# EAGLE board UCirKitBreadboard-0823 (EAGLE 6.5.0), part 1 of 2

Size 70 x 100 mm. Coordinates in mm from the lower left corner, seen from the top.
Outline: 0,0 70,0 70,100 0,100 0,0
Copper layers (1*16): Top 0.035mm / dielectric 1.5mm / Bottom 0.035mm
Design rules "default": minimum track width 10mil, minimum drill 24mil, track to track 8mil, track to pad 8mil, pad to pad 8mil, via to via 8mil, smd to smd 8mil, copper to edge 40mil, drill to drill 8mil, minimum pad ring 10mil, minimum via ring 8mil, stop-mask expansion 4mil, vias tented up to drill 0mil, thermal gap 10mil

## Footprints (pad centres in the part's own frame; a part is rotated, then mirrored left to right if it is on the bottom)
1X01_WITHOUT_TEXT = drill 1.016 pad 1.88: 1 0,0
1X01_SMD_3.25X0.85MM_NO_SILK = smd 3.25 x 0.85: P$1 0,0

## Placement (x,y rotation side)
JP1  [1X01_WITHOUT_TEXT]  19.76,86.83 0 top
JP2  [1X01_WITHOUT_TEXT]  22.3,86.83 0 top
JP3  [1X01_WITHOUT_TEXT]  24.84,86.83 0 top
JP4  [1X01_WITHOUT_TEXT]  27.38,86.83 0 top
JP5  [1X01_WITHOUT_TEXT]  29.92,86.83 0 top
JP6  [1X01_WITHOUT_TEXT]  40.08,86.83 0 top
JP7  [1X01_WITHOUT_TEXT]  42.62,86.83 0 top
JP8  [1X01_WITHOUT_TEXT]  45.16,86.83 0 top
JP9  [1X01_WITHOUT_TEXT]  47.7,86.83 0 top
JP10  [1X01_WITHOUT_TEXT]  50.24,86.83 0 top
JP11  [1X01_WITHOUT_TEXT]  19.76,84.29 0 top
JP12  [1X01_WITHOUT_TEXT]  22.3,84.29 0 top
JP13  [1X01_WITHOUT_TEXT]  24.84,84.29 0 top
JP14  [1X01_WITHOUT_TEXT]  27.38,84.29 0 top
JP15  [1X01_WITHOUT_TEXT]  29.92,84.29 0 top
JP16  [1X01_WITHOUT_TEXT]  40.08,84.29 0 top
JP17  [1X01_WITHOUT_TEXT]  42.62,84.29 0 top
JP18  [1X01_WITHOUT_TEXT]  45.16,84.29 0 top
JP19  [1X01_WITHOUT_TEXT]  47.7,84.29 0 top
JP20  [1X01_WITHOUT_TEXT]  50.24,84.29 0 top
JP21  [1X01_WITHOUT_TEXT]  19.76,81.75 0 top
JP22  [1X01_WITHOUT_TEXT]  22.3,81.75 0 top
JP23  [1X01_WITHOUT_TEXT]  24.84,81.75 0 top
JP24  [1X01_WITHOUT_TEXT]  27.38,81.75 0 top
JP25  [1X01_WITHOUT_TEXT]  29.92,81.75 0 top
JP26  [1X01_WITHOUT_TEXT]  40.08,81.75 0 top
JP27  [1X01_WITHOUT_TEXT]  42.62,81.75 0 top
JP28  [1X01_WITHOUT_TEXT]  45.16,81.75 0 top
JP29  [1X01_WITHOUT_TEXT]  47.7,81.75 0 top
JP30  [1X01_WITHOUT_TEXT]  50.24,81.75 0 top
JP31  [1X01_WITHOUT_TEXT]  19.76,79.21 0 top
JP32  [1X01_WITHOUT_TEXT]  22.3,79.21 0 top
JP33  [1X01_WITHOUT_TEXT]  24.84,79.21 0 top
JP34  [1X01_WITHOUT_TEXT]  27.38,79.21 0 top
JP35  [1X01_WITHOUT_TEXT]  29.92,79.21 0 top
JP36  [1X01_WITHOUT_TEXT]  40.08,79.21 0 top
JP37  [1X01_WITHOUT_TEXT]  42.62,79.21 0 top
JP38  [1X01_WITHOUT_TEXT]  45.16,79.21 0 top
JP39  [1X01_WITHOUT_TEXT]  47.7,79.21 0 top
JP40  [1X01_WITHOUT_TEXT]  50.24,79.21 0 top
JP41  [1X01_WITHOUT_TEXT]  19.76,76.67 0 top
JP42  [1X01_WITHOUT_TEXT]  22.3,76.67 0 top
JP43  [1X01_WITHOUT_TEXT]  24.84,76.67 0 top
JP44  [1X01_WITHOUT_TEXT]  27.38,76.67 0 top
JP45  [1X01_WITHOUT_TEXT]  29.92,76.67 0 top
JP46  [1X01_WITHOUT_TEXT]  40.08,76.67 0 top
JP47  [1X01_WITHOUT_TEXT]  42.62,76.67 0 top
JP48  [1X01_WITHOUT_TEXT]  45.16,76.67 0 top
JP49  [1X01_WITHOUT_TEXT]  47.7,76.67 0 top
JP50  [1X01_WITHOUT_TEXT]  50.24,76.67 0 top
JP51  [1X01_WITHOUT_TEXT]  19.76,74.13 0 top
JP52  [1X01_WITHOUT_TEXT]  22.3,74.13 0 top
JP53  [1X01_WITHOUT_TEXT]  24.84,74.13 0 top
JP54  [1X01_WITHOUT_TEXT]  27.38,74.13 0 top
JP55  [1X01_WITHOUT_TEXT]  29.92,74.13 0 top
JP56  [1X01_WITHOUT_TEXT]  40.08,74.13 0 top
JP57  [1X01_WITHOUT_TEXT]  42.62,74.13 0 top
JP58  [1X01_WITHOUT_TEXT]  45.16,74.13 0 top
JP59  [1X01_WITHOUT_TEXT]  47.7,74.13 0 top
JP60  [1X01_WITHOUT_TEXT]  50.24,74.13 0 top
JP61  [1X01_WITHOUT_TEXT]  19.76,71.59 0 top
JP62  [1X01_WITHOUT_TEXT]  22.3,71.59 0 top
JP63  [1X01_WITHOUT_TEXT]  24.84,71.59 0 top
JP64  [1X01_WITHOUT_TEXT]  27.38,71.59 0 top
JP65  [1X01_WITHOUT_TEXT]  29.92,71.59 0 top
JP66  [1X01_WITHOUT_TEXT]  40.08,71.59 0 top
JP67  [1X01_WITHOUT_TEXT]  42.62,71.59 0 top
JP68  [1X01_WITHOUT_TEXT]  45.16,71.59 0 top
JP69  [1X01_WITHOUT_TEXT]  47.7,71.59 0 top
JP70  [1X01_WITHOUT_TEXT]  50.24,71.59 0 top
JP71  [1X01_WITHOUT_TEXT]  19.76,69.05 0 top
JP72  [1X01_WITHOUT_TEXT]  22.3,69.05 0 top
JP73  [1X01_WITHOUT_TEXT]  24.84,69.05 0 top
JP74  [1X01_WITHOUT_TEXT]  27.38,69.05 0 top
JP75  [1X01_WITHOUT_TEXT]  29.92,69.05 0 top
JP76  [1X01_WITHOUT_TEXT]  40.08,69.05 0 top
JP77  [1X01_WITHOUT_TEXT]  42.62,69.05 0 top
JP78  [1X01_WITHOUT_TEXT]  45.16,69.05 0 top
JP79  [1X01_WITHOUT_TEXT]  47.7,69.05 0 top
JP80  [1X01_WITHOUT_TEXT]  50.24,69.05 0 top
JP81  [1X01_WITHOUT_TEXT]  19.76,66.51 0 top
JP82  [1X01_WITHOUT_TEXT]  22.3,66.51 0 top
JP83  [1X01_WITHOUT_TEXT]  24.84,66.51 0 top
JP84  [1X01_WITHOUT_TEXT]  27.38,66.51 0 top
JP85  [1X01_WITHOUT_TEXT]  29.92,66.51 0 top
JP86  [1X01_WITHOUT_TEXT]  40.08,66.51 0 top
JP87  [1X01_WITHOUT_TEXT]  42.62,66.51 0 top
JP88  [1X01_WITHOUT_TEXT]  45.16,66.51 0 top
JP89  [1X01_WITHOUT_TEXT]  47.7,66.51 0 top
JP90  [1X01_WITHOUT_TEXT]  50.24,66.51 0 top
JP91  [1X01_WITHOUT_TEXT]  19.76,63.97 0 top
JP92  [1X01_WITHOUT_TEXT]  22.3,63.97 0 top
JP93  [1X01_WITHOUT_TEXT]  24.84,63.97 0 top
JP94  [1X01_WITHOUT_TEXT]  27.38,63.97 0 top
JP95  [1X01_WITHOUT_TEXT]  29.92,63.97 0 top
JP96  [1X01_WITHOUT_TEXT]  40.08,63.97 0 top
JP97  [1X01_WITHOUT_TEXT]  42.62,63.97 0 top
JP98  [1X01_WITHOUT_TEXT]  45.16,63.97 0 top
JP99  [1X01_WITHOUT_TEXT]  47.7,63.97 0 top
JP100  [1X01_WITHOUT_TEXT]  50.24,63.97 0 top
JP101  [1X01_WITHOUT_TEXT]  19.76,61.43 0 top
JP102  [1X01_WITHOUT_TEXT]  22.3,61.43 0 top
JP103  [1X01_WITHOUT_TEXT]  24.84,61.43 0 top
JP104  [1X01_WITHOUT_TEXT]  27.38,61.43 0 top
JP105  [1X01_WITHOUT_TEXT]  29.92,61.43 0 top
JP106  [1X01_WITHOUT_TEXT]  40.08,61.43 0 top
JP107  [1X01_WITHOUT_TEXT]  42.62,61.43 0 top
JP108  [1X01_WITHOUT_TEXT]  45.16,61.43 0 top
JP109  [1X01_WITHOUT_TEXT]  47.7,61.43 0 top
JP110  [1X01_WITHOUT_TEXT]  50.24,61.43 0 top
JP111  [1X01_WITHOUT_TEXT]  19.76,58.89 0 top
JP112  [1X01_WITHOUT_TEXT]  22.3,58.89 0 top
JP113  [1X01_WITHOUT_TEXT]  24.84,58.89 0 top
JP114  [1X01_WITHOUT_TEXT]  27.38,58.89 0 top
JP115  [1X01_WITHOUT_TEXT]  29.92,58.89 0 top
JP116  [1X01_WITHOUT_TEXT]  40.08,58.89 0 top
JP117  [1X01_WITHOUT_TEXT]  42.62,58.89 0 top
JP118  [1X01_WITHOUT_TEXT]  45.16,58.89 0 top
JP119  [1X01_WITHOUT_TEXT]  47.7,58.89 0 top
JP120  [1X01_WITHOUT_TEXT]  50.24,58.89 0 top
JP121  [1X01_WITHOUT_TEXT]  19.76,56.35 0 top
JP122  [1X01_WITHOUT_TEXT]  22.3,56.35 0 top
JP123  [1X01_WITHOUT_TEXT]  24.84,56.35 0 top
JP124  [1X01_WITHOUT_TEXT]  27.38,56.35 0 top
JP125  [1X01_WITHOUT_TEXT]  29.92,56.35 0 top
JP126  [1X01_WITHOUT_TEXT]  40.08,56.35 0 top
JP127  [1X01_WITHOUT_TEXT]  42.62,56.35 0 top
JP128  [1X01_WITHOUT_TEXT]  45.16,56.35 0 top
JP129  [1X01_WITHOUT_TEXT]  47.7,56.35 0 top
JP130  [1X01_WITHOUT_TEXT]  50.24,56.35 0 top
JP131  [1X01_WITHOUT_TEXT]  19.76,53.81 0 top
JP132  [1X01_WITHOUT_TEXT]  22.3,53.81 0 top
JP133  [1X01_WITHOUT_TEXT]  24.84,53.81 0 top
JP134  [1X01_WITHOUT_TEXT]  27.38,53.81 0 top
JP135  [1X01_WITHOUT_TEXT]  29.92,53.81 0 top
JP136  [1X01_WITHOUT_TEXT]  40.08,53.81 0 top
JP137  [1X01_WITHOUT_TEXT]  42.62,53.81 0 top
JP138  [1X01_WITHOUT_TEXT]  45.16,53.81 0 top
JP139  [1X01_WITHOUT_TEXT]  47.7,53.81 0 top
JP140  [1X01_WITHOUT_TEXT]  50.24,53.81 0 top
JP141  [1X01_WITHOUT_TEXT]  19.76,51.27 0 top
JP142  [1X01_WITHOUT_TEXT]  22.3,51.27 0 top
JP143  [1X01_WITHOUT_TEXT]  24.84,51.27 0 top
JP144  [1X01_WITHOUT_TEXT]  27.38,51.27 0 top
JP145  [1X01_WITHOUT_TEXT]  29.92,51.27 0 top
JP146  [1X01_WITHOUT_TEXT]  40.08,51.27 0 top
JP147  [1X01_WITHOUT_TEXT]  42.62,51.27 0 top
JP148  [1X01_WITHOUT_TEXT]  45.16,51.27 0 top
JP149  [1X01_WITHOUT_TEXT]  47.7,51.27 0 top
JP150  [1X01_WITHOUT_TEXT]  50.24,51.27 0 top
JP151  [1X01_WITHOUT_TEXT]  19.76,48.73 0 top
JP152  [1X01_WITHOUT_TEXT]  22.3,48.73 0 top
JP153  [1X01_WITHOUT_TEXT]  24.84,48.73 0 top
JP154  [1X01_WITHOUT_TEXT]  27.38,48.73 0 top
JP155  [1X01_WITHOUT_TEXT]  29.92,48.73 0 top
JP156  [1X01_WITHOUT_TEXT]  40.08,48.73 0 top
JP157  [1X01_WITHOUT_TEXT]  42.62,48.73 0 top
JP158  [1X01_WITHOUT_TEXT]  45.16,48.73 0 top
JP159  [1X01_WITHOUT_TEXT]  47.7,48.73 0 top
JP160  [1X01_WITHOUT_TEXT]  50.24,48.73 0 top
JP161  [1X01_WITHOUT_TEXT]  19.76,46.19 0 top
JP162  [1X01_WITHOUT_TEXT]  22.3,46.19 0 top
JP163  [1X01_WITHOUT_TEXT]  24.84,46.19 0 top
JP164  [1X01_WITHOUT_TEXT]  27.38,46.19 0 top
JP165  [1X01_WITHOUT_TEXT]  29.92,46.19 0 top
JP166  [1X01_WITHOUT_TEXT]  40.08,46.19 0 top
JP167  [1X01_WITHOUT_TEXT]  42.62,46.19 0 top
JP168  [1X01_WITHOUT_TEXT]  45.16,46.19 0 top
JP169  [1X01_WITHOUT_TEXT]  47.7,46.19 0 top
JP170  [1X01_WITHOUT_TEXT]  50.24,46.19 0 top
JP171  [1X01_WITHOUT_TEXT]  19.76,43.65 0 top
JP172  [1X01_WITHOUT_TEXT]  22.3,43.65 0 top
JP173  [1X01_WITHOUT_TEXT]  24.84,43.65 0 top
JP174  [1X01_WITHOUT_TEXT]  27.38,43.65 0 top
JP175  [1X01_WITHOUT_TEXT]  29.92,43.65 0 top
JP176  [1X01_WITHOUT_TEXT]  40.08,43.65 0 top
JP177  [1X01_WITHOUT_TEXT]  42.62,43.65 0 top
JP178  [1X01_WITHOUT_TEXT]  45.16,43.65 0 top
JP179  [1X01_WITHOUT_TEXT]  47.7,43.65 0 top
JP180  [1X01_WITHOUT_TEXT]  50.24,43.65 0 top
JP181  [1X01_WITHOUT_TEXT]  19.76,41.11 0 top
JP182  [1X01_WITHOUT_TEXT]  22.3,41.11 0 top
JP183  [1X01_WITHOUT_TEXT]  24.84,41.11 0 top
JP184  [1X01_WITHOUT_TEXT]  27.38,41.11 0 top
JP185  [1X01_WITHOUT_TEXT]  29.92,41.11 0 top
JP186  [1X01_WITHOUT_TEXT]  40.08,41.11 0 top
JP187  [1X01_WITHOUT_TEXT]  42.62,41.11 0 top
JP188  [1X01_WITHOUT_TEXT]  45.16,41.11 0 top
JP189  [1X01_WITHOUT_TEXT]  47.7,41.11 0 top
JP190  [1X01_WITHOUT_TEXT]  50.24,41.11 0 top
JP191  [1X01_WITHOUT_TEXT]  19.76,38.57 0 top
JP192  [1X01_WITHOUT_TEXT]  22.3,38.57 0 top
JP193  [1X01_WITHOUT_TEXT]  24.84,38.57 0 top
JP194  [1X01_WITHOUT_TEXT]  27.38,38.57 0 top
JP195  [1X01_WITHOUT_TEXT]  29.92,38.57 0 top
JP196  [1X01_WITHOUT_TEXT]  40.08,38.57 0 top
JP197  [1X01_WITHOUT_TEXT]  42.62,38.57 0 top
JP198  [1X01_WITHOUT_TEXT]  45.16,38.57 0 top
JP199  [1X01_WITHOUT_TEXT]  47.7,38.57 0 top
JP200  [1X01_WITHOUT_TEXT]  50.24,38.57 0 top
JP201  [1X01_WITHOUT_TEXT]  19.76,36.03 0 top
JP202  [1X01_WITHOUT_TEXT]  22.3,36.03 0 top
JP203  [1X01_WITHOUT_TEXT]  24.84,36.03 0 top
JP204  [1X01_WITHOUT_TEXT]  27.38,36.03 0 top
JP205  [1X01_WITHOUT_TEXT]  29.92,36.03 0 top
JP206  [1X01_WITHOUT_TEXT]  40.08,36.03 0 top
JP207  [1X01_WITHOUT_TEXT]  42.62,36.03 0 top
JP208  [1X01_WITHOUT_TEXT]  45.16,36.03 0 top
JP209  [1X01_WITHOUT_TEXT]  47.7,36.03 0 top
JP210  [1X01_WITHOUT_TEXT]  50.24,36.03 0 top
JP211  [1X01_WITHOUT_TEXT]  19.76,33.49 0 top
JP212  [1X01_WITHOUT_TEXT]  22.3,33.49 0 top
JP213  [1X01_WITHOUT_TEXT]  24.84,33.49 0 top
JP214  [1X01_WITHOUT_TEXT]  27.38,33.49 0 top
JP215  [1X01_WITHOUT_TEXT]  29.92,33.49 0 top
JP216  [1X01_WITHOUT_TEXT]  40.08,33.49 0 top
JP217  [1X01_WITHOUT_TEXT]  42.62,33.49 0 top
JP218  [1X01_WITHOUT_TEXT]  45.16,33.49 0 top
JP219  [1X01_WITHOUT_TEXT]  47.7,33.49 0 top
JP220  [1X01_WITHOUT_TEXT]  50.24,33.49 0 top
JP221  [1X01_WITHOUT_TEXT]  19.76,30.95 0 top
JP222  [1X01_WITHOUT_TEXT]  22.3,30.95 0 top
JP223  [1X01_WITHOUT_TEXT]  24.84,30.95 0 top
JP224  [1X01_WITHOUT_TEXT]  27.38,30.95 0 top
JP225  [1X01_WITHOUT_TEXT]  29.92,30.95 0 top
JP226  [1X01_WITHOUT_TEXT]  40.08,30.95 0 top
JP227  [1X01_WITHOUT_TEXT]  42.62,30.95 0 top
JP228  [1X01_WITHOUT_TEXT]  45.16,30.95 0 top
JP229  [1X01_WITHOUT_TEXT]  47.7,30.95 0 top
JP230  [1X01_WITHOUT_TEXT]  50.24,30.95 0 top
JP231  [1X01_WITHOUT_TEXT]  19.76,28.41 0 top
JP232  [1X01_WITHOUT_TEXT]  22.3,28.41 0 top
JP233  [1X01_WITHOUT_TEXT]  24.84,28.41 0 top
JP234  [1X01_WITHOUT_TEXT]  27.38,28.41 0 top
JP235  [1X01_WITHOUT_TEXT]  29.92,28.41 0 top
JP236  [1X01_WITHOUT_TEXT]  40.08,28.41 0 top
JP237  [1X01_WITHOUT_TEXT]  42.62,28.41 0 top
JP238  [1X01_WITHOUT_TEXT]  45.16,28.41 0 top
JP239  [1X01_WITHOUT_TEXT]  47.7,28.41 0 top
JP240  [1X01_WITHOUT_TEXT]  50.24,28.41 0 top
JP241  [1X01_WITHOUT_TEXT]  19.76,25.87 0 top
JP242  [1X01_WITHOUT_TEXT]  22.3,25.87 0 top
JP243  [1X01_WITHOUT_TEXT]  24.84,25.87 0 top
JP244  [1X01_WITHOUT_TEXT]  27.38,25.87 0 top
JP245  [1X01_WITHOUT_TEXT]  29.92,25.87 0 top
JP246  [1X01_WITHOUT_TEXT]  40.08,25.87 0 top
JP247  [1X01_WITHOUT_TEXT]  42.62,25.87 0 top
JP248  [1X01_WITHOUT_TEXT]  45.16,25.87 0 top
JP249  [1X01_WITHOUT_TEXT]  47.7,25.87 0 top
JP250  [1X01_WITHOUT_TEXT]  50.24,25.87 0 top
JP251  [1X01_WITHOUT_TEXT]  19.76,23.33 0 top
JP252  [1X01_WITHOUT_TEXT]  22.3,23.33 0 top
JP253  [1X01_WITHOUT_TEXT]  24.84,23.33 0 top
JP254  [1X01_WITHOUT_TEXT]  27.38,23.33 0 top
JP255  [1X01_WITHOUT_TEXT]  29.92,23.33 0 top
JP256  [1X01_WITHOUT_TEXT]  40.08,23.33 0 top
JP257  [1X01_WITHOUT_TEXT]  42.62,23.33 0 top
JP258  [1X01_WITHOUT_TEXT]  45.16,23.33 0 top
JP259  [1X01_WITHOUT_TEXT]  47.7,23.33 0 top
JP260  [1X01_WITHOUT_TEXT]  50.24,23.33 0 top
JP261  [1X01_WITHOUT_TEXT]  19.76,20.79 0 top
JP262  [1X01_WITHOUT_TEXT]  22.3,20.79 0 top
JP263  [1X01_WITHOUT_TEXT]  24.84,20.79 0 top
JP264  [1X01_WITHOUT_TEXT]  27.38,20.79 0 top
JP265  [1X01_WITHOUT_TEXT]  29.92,20.79 0 top
JP266  [1X01_WITHOUT_TEXT]  40.08,20.79 0 top
JP267  [1X01_WITHOUT_TEXT]  42.62,20.79 0 top
JP268  [1X01_WITHOUT_TEXT]  45.16,20.79 0 top
JP269  [1X01_WITHOUT_TEXT]  47.7,20.79 0 top
JP270  [1X01_WITHOUT_TEXT]  50.24,20.79 0 top
JP271  [1X01_WITHOUT_TEXT]  19.76,18.25 0 top
JP272  [1X01_WITHOUT_TEXT]  22.3,18.25 0 top
JP273  [1X01_WITHOUT_TEXT]  24.84,18.25 0 top
JP274  [1X01_WITHOUT_TEXT]  27.38,18.25 0 top
JP275  [1X01_WITHOUT_TEXT]  29.92,18.25 0 top
JP276  [1X01_WITHOUT_TEXT]  40.08,18.25 0 top
JP277  [1X01_WITHOUT_TEXT]  42.62,18.25 0 top
JP278  [1X01_WITHOUT_TEXT]  45.16,18.25 0 top
JP279  [1X01_WITHOUT_TEXT]  47.7,18.25 0 top
JP280  [1X01_WITHOUT_TEXT]  50.24,18.25 0 top
JP281  [1X01_WITHOUT_TEXT]  19.76,15.71 0 top
JP282  [1X01_WITHOUT_TEXT]  22.3,15.71 0 top
JP283  [1X01_WITHOUT_TEXT]  24.84,15.71 0 top
JP284  [1X01_WITHOUT_TEXT]  27.38,15.71 0 top
JP285  [1X01_WITHOUT_TEXT]  29.92,15.71 0 top
JP286  [1X01_WITHOUT_TEXT]  40.08,15.71 0 top
JP287  [1X01_WITHOUT_TEXT]  42.62,15.71 0 top
JP288  [1X01_WITHOUT_TEXT]  45.16,15.71 0 top
JP289  [1X01_WITHOUT_TEXT]  47.7,15.71 0 top
JP290  [1X01_WITHOUT_TEXT]  50.24,15.71 0 top
JP291  [1X01_WITHOUT_TEXT]  19.76,13.17 0 top
JP292  [1X01_WITHOUT_TEXT]  22.3,13.17 0 top
JP293  [1X01_WITHOUT_TEXT]  24.84,13.17 0 top
JP294  [1X01_WITHOUT_TEXT]  27.38,13.17 0 top
JP295  [1X01_WITHOUT_TEXT]  29.92,13.17 0 top
JP296  [1X01_WITHOUT_TEXT]  40.08,13.17 0 top
JP297  [1X01_WITHOUT_TEXT]  42.62,13.17 0 top
JP298  [1X01_WITHOUT_TEXT]  45.16,13.17 0 top
JP299  [1X01_WITHOUT_TEXT]  47.7,13.17 0 top
JP300  [1X01_WITHOUT_TEXT]  50.24,13.17 0 top
JP301  [1X01_SMD_3.25X0.85MM_NO_SILK]  15.2,84.36 0 top
JP302  [1X01_SMD_3.25X0.85MM_NO_SILK]  19.6,84.36 0 top
JP303  [1X01_SMD_3.25X0.85MM_NO_SILK]  24,84.36 0 top
JP304  [1X01_SMD_3.25X0.85MM_NO_SILK]  28.4,84.36 0 top
JP305  [1X01_SMD_3.25X0.85MM_NO_SILK]  32.8,84.36 0 top
JP306  [1X01_SMD_3.25X0.85MM_NO_SILK]  37.2,84.36 0 top
JP307  [1X01_SMD_3.25X0.85MM_NO_SILK]  41.6,84.36 0 top
JP308  [1X01_SMD_3.25X0.85MM_NO_SILK]  46,84.36 0 top
JP309  [1X01_SMD_3.25X0.85MM_NO_SILK]  50.4,84.36 0 top
JP310  [1X01_SMD_3.25X0.85MM_NO_SILK]  54.8,84.36 0 top
JP311  [1X01_SMD_3.25X0.85MM_NO_SILK]  15.2,82 0 top
JP312  [1X01_SMD_3.25X0.85MM_NO_SILK]  19.6,82 0 top
JP313  [1X01_SMD_3.25X0.85MM_NO_SILK]  24,82 0 top
JP314  [1X01_SMD_3.25X0.85MM_NO_SILK]  28.4,82 0 top
JP315  [1X01_SMD_3.25X0.85MM_NO_SILK]  32.8,82 0 top
JP316  [1X01_SMD_3.25X0.85MM_NO_SILK]  37.2,82 0 top
JP317  [1X01_SMD_3.25X0.85MM_NO_SILK]  41.6,82 0 top
JP318  [1X01_SMD_3.25X0.85MM_NO_SILK]  46,82 0 top
JP319  [1X01_SMD_3.25X0.85MM_NO_SILK]  50.4,82 0 top
JP320  [1X01_SMD_3.25X0.85MM_NO_SILK]  54.8,82 0 top
JP321  [1X01_SMD_3.25X0.85MM_NO_SILK]  15.2,79.62 0 top
JP322  [1X01_SMD_3.25X0.85MM_NO_SILK]  19.6,79.62 0 top
JP323  [1X01_SMD_3.25X0.85MM_NO_SILK]  24,79.62 0 top
JP324  [1X01_SMD_3.25X0.85MM_NO_SILK]  28.4,79.62 0 top
JP325  [1X01_SMD_3.25X0.85MM_NO_SILK]  32.8,79.62 0 top
JP326  [1X01_SMD_3.25X0.85MM_NO_SILK]  37.2,79.62 0 top
JP327  [1X01_SMD_3.25X0.85MM_NO_SILK]  41.6,79.62 0 top
JP328  [1X01_SMD_3.25X0.85MM_NO_SILK]  46,79.62 0 top
JP329  [1X01_SMD_3.25X0.85MM_NO_SILK]  50.4,79.62 0 top
JP330  [1X01_SMD_3.25X0.85MM_NO_SILK]  54.8,79.62 0 top
JP331  [1X01_SMD_3.25X0.85MM_NO_SILK]  15.2,77.25 0 top
JP332  [1X01_SMD_3.25X0.85MM_NO_SILK]  19.6,77.25 0 top
JP333  [1X01_SMD_3.25X0.85MM_NO_SILK]  24,77.25 0 top
JP334  [1X01_SMD_3.25X0.85MM_NO_SILK]  28.4,77.25 0 top
JP335  [1X01_SMD_3.25X0.85MM_NO_SILK]  32.8,77.25 0 top
JP336  [1X01_SMD_3.25X0.85MM_NO_SILK]  37.2,77.25 0 top
JP337  [1X01_SMD_3.25X0.85MM_NO_SILK]  41.6,77.25 0 top
JP338  [1X01_SMD_3.25X0.85MM_NO_SILK]  46,77.25 0 top
JP339  [1X01_SMD_3.25X0.85MM_NO_SILK]  50.4,77.25 0 top
JP340  [1X01_SMD_3.25X0.85MM_NO_SILK]  54.8,77.25 0 top
JP341  [1X01_SMD_3.25X0.85MM_NO_SILK]  15.2,74.89 0 top
JP342  [1X01_SMD_3.25X0.85MM_NO_SILK]  19.6,74.89 0 top
JP343  [1X01_SMD_3.25X0.85MM_NO_SILK]  24,74.89 0 top
JP344  [1X01_SMD_3.25X0.85MM_NO_SILK]  28.4,74.89 0 top
JP345  [1X01_SMD_3.25X0.85MM_NO_SILK]  32.8,74.89 0 top
JP346  [1X01_SMD_3.25X0.85MM_NO_SILK]  37.2,74.89 0 top
JP347  [1X01_SMD_3.25X0.85MM_NO_SILK]  41.6,74.89 0 top
JP348  [1X01_SMD_3.25X0.85MM_NO_SILK]  46,74.89 0 top
JP349  [1X01_SMD_3.25X0.85MM_NO_SILK]  50.4,74.89 0 top
JP350  [1X01_SMD_3.25X0.85MM_NO_SILK]  54.8,74.89 0 top
JP351  [1X01_SMD_3.25X0.85MM_NO_SILK]  15.2,72.52 0 top
JP352  [1X01_SMD_3.25X0.85MM_NO_SILK]  19.6,72.52 0 top
JP353  [1X01_SMD_3.25X0.85MM_NO_SILK]  24,72.52 0 top
JP354  [1X01_SMD_3.25X0.85MM_NO_SILK]  28.4,72.52 0 top
JP355  [1X01_SMD_3.25X0.85MM_NO_SILK]  32.8,72.52 0 top
JP356  [1X01_SMD_3.25X0.85MM_NO_SILK]  37.2,72.52 0 top
JP357  [1X01_SMD_3.25X0.85MM_NO_SILK]  41.6,72.52 0 top
JP358  [1X01_SMD_3.25X0.85MM_NO_SILK]  46,72.52 0 top
JP359  [1X01_SMD_3.25X0.85MM_NO_SILK]  50.4,72.52 0 top
JP360  [1X01_SMD_3.25X0.85MM_NO_SILK]  54.8,72.52 0 top
JP361  [1X01_SMD_3.25X0.85MM_NO_SILK]  15.2,70.14 0 top
JP362  [1X01_SMD_3.25X0.85MM_NO_SILK]  19.6,70.14 0 top
JP363  [1X01_SMD_3.25X0.85MM_NO_SILK]  24,70.14 0 top
JP364  [1X01_SMD_3.25X0.85MM_NO_SILK]  28.4,70.14 0 top
JP365  [1X01_SMD_3.25X0.85MM_NO_SILK]  32.8,70.14 0 top
JP366  [1X01_SMD_3.25X0.85MM_NO_SILK]  37.2,70.14 0 top
JP367  [1X01_SMD_3.25X0.85MM_NO_SILK]  41.6,70.14 0 top
JP368  [1X01_SMD_3.25X0.85MM_NO_SILK]  46,70.14 0 top
JP369  [1X01_SMD_3.25X0.85MM_NO_SILK]  50.4,70.14 0 top
JP370  [1X01_SMD_3.25X0.85MM_NO_SILK]  54.8,70.14 0 top
JP371  [1X01_SMD_3.25X0.85MM_NO_SILK]  15.2,67.78 0 top
JP372  [1X01_SMD_3.25X0.85MM_NO_SILK]  19.6,67.78 0 top
JP373  [1X01_SMD_3.25X0.85MM_NO_SILK]  24,67.78 0 top
JP374  [1X01_SMD_3.25X0.85MM_NO_SILK]  28.4,67.78 0 top
JP375  [1X01_SMD_3.25X0.85MM_NO_SILK]  32.8,67.78 0 top
JP376  [1X01_SMD_3.25X0.85MM_NO_SILK]  37.2,67.78 0 top
JP377  [1X01_SMD_3.25X0.85MM_NO_SILK]  41.6,67.78 0 top
JP378  [1X01_SMD_3.25X0.85MM_NO_SILK]  46,67.78 0 top
JP379  [1X01_SMD_3.25X0.85MM_NO_SILK]  50.4,67.78 0 top
JP380  [1X01_SMD_3.25X0.85MM_NO_SILK]  54.8,67.78 0 top
JP381  [1X01_SMD_3.25X0.85MM_NO_SILK]  15.2,65.41 0 top
JP382  [1X01_SMD_3.25X0.85MM_NO_SILK]  19.6,65.41 0 top
JP383  [1X01_SMD_3.25X0.85MM_NO_SILK]  24,65.41 0 top
JP384  [1X01_SMD_3.25X0.85MM_NO_SILK]  28.4,65.41 0 top
JP385  [1X01_SMD_3.25X0.85MM_NO_SILK]  32.8,65.41 0 top
JP386  [1X01_SMD_3.25X0.85MM_NO_SILK]  37.2,65.41 0 top
JP387  [1X01_SMD_3.25X0.85MM_NO_SILK]  41.6,65.41 0 top
JP388  [1X01_SMD_3.25X0.85MM_NO_SILK]  46,65.41 0 top
JP389  [1X01_SMD_3.25X0.85MM_NO_SILK]  50.4,65.41 0 top
JP390  [1X01_SMD_3.25X0.85MM_NO_SILK]  54.8,65.41 0 top
JP391  [1X01_SMD_3.25X0.85MM_NO_SILK]  15.2,63.03 0 top
JP392  [1X01_SMD_3.25X0.85MM_NO_SILK]  19.6,63.03 0 top
JP393  [1X01_SMD_3.25X0.85MM_NO_SILK]  24,63.03 0 top
JP394  [1X01_SMD_3.25X0.85MM_NO_SILK]  28.4,63.03 0 top
JP395  [1X01_SMD_3.25X0.85MM_NO_SILK]  32.8,63.03 0 top
JP396  [1X01_SMD_3.25X0.85MM_NO_SILK]  37.2,63.03 0 top
JP397  [1X01_SMD_3.25X0.85MM_NO_SILK]  41.6,63.03 0 top
JP398  [1X01_SMD_3.25X0.85MM_NO_SILK]  46,63.03 0 top
JP399  [1X01_SMD_3.25X0.85MM_NO_SILK]  50.4,63.03 0 top
JP400  [1X01_SMD_3.25X0.85MM_NO_SILK]  54.8,63.03 0 top
JP401  [1X01_SMD_3.25X0.85MM_NO_SILK]  15.2,60.66 0 top
JP402  [1X01_SMD_3.25X0.85MM_NO_SILK]  19.6,60.66 0 top
JP403  [1X01_SMD_3.25X0.85MM_NO_SILK]  24,60.66 0 top
JP404  [1X01_SMD_3.25X0.85MM_NO_SILK]  28.4,60.66 0 top
JP405  [1X01_SMD_3.25X0.85MM_NO_SILK]  32.8,60.66 0 top
JP406  [1X01_SMD_3.25X0.85MM_NO_SILK]  37.2,60.66 0 top
JP407  [1X01_SMD_3.25X0.85MM_NO_SILK]  41.6,60.66 0 top
JP408  [1X01_SMD_3.25X0.85MM_NO_SILK]  46,60.66 0 top
JP409  [1X01_SMD_3.25X0.85MM_NO_SILK]  50.4,60.66 0 top
JP410  [1X01_SMD_3.25X0.85MM_NO_SILK]  54.8,60.66 0 top
JP411  [1X01_SMD_3.25X0.85MM_NO_SILK]  15.2,58.3 0 top
JP412  [1X01_SMD_3.25X0.85MM_NO_SILK]  19.6,58.3 0 top
JP413  [1X01_SMD_3.25X0.85MM_NO_SILK]  24,58.3 0 top
JP414  [1X01_SMD_3.25X0.85MM_NO_SILK]  28.4,58.3 0 top
JP415  [1X01_SMD_3.25X0.85MM_NO_SILK]  32.8,58.3 0 top
JP416  [1X01_SMD_3.25X0.85MM_NO_SILK]  37.2,58.3 0 top
JP417  [1X01_SMD_3.25X0.85MM_NO_SILK]  41.6,58.3 0 top
JP418  [1X01_SMD_3.25X0.85MM_NO_SILK]  46,58.3 0 top
JP419  [1X01_SMD_3.25X0.85MM_NO_SILK]  50.4,58.3 0 top
JP420  [1X01_SMD_3.25X0.85MM_NO_SILK]  54.8,58.3 0 top
JP421  [1X01_SMD_3.25X0.85MM_NO_SILK]  15.2,55.92 0 top
JP422  [1X01_SMD_3.25X0.85MM_NO_SILK]  19.6,55.92 0 top
JP423  [1X01_SMD_3.25X0.85MM_NO_SILK]  24,55.92 0 top
JP424  [1X01_SMD_3.25X0.85MM_NO_SILK]  28.4,55.92 0 top
JP425  [1X01_SMD_3.25X0.85MM_NO_SILK]  32.8,55.92 0 top
JP426  [1X01_SMD_3.25X0.85MM_NO_SILK]  37.2,55.92 0 top
JP427  [1X01_SMD_3.25X0.85MM_NO_SILK]  41.6,55.92 0 top
JP428  [1X01_SMD_3.25X0.85MM_NO_SILK]  46,55.92 0 top
JP429  [1X01_SMD_3.25X0.85MM_NO_SILK]  50.4,55.92 0 top
JP430  [1X01_SMD_3.25X0.85MM_NO_SILK]  54.8,55.92 0 top
JP431  [1X01_SMD_3.25X0.85MM_NO_SILK]  15.2,53.55 0 top
JP432  [1X01_SMD_3.25X0.85MM_NO_SILK]  19.6,53.55 0 top
JP433  [1X01_SMD_3.25X0.85MM_NO_SILK]  24,53.55 0 top
JP434  [1X01_SMD_3.25X0.85MM_NO_SILK]  28.4,53.55 0 top
JP435  [1X01_SMD_3.25X0.85MM_NO_SILK]  32.8,53.55 0 top
JP436  [1X01_SMD_3.25X0.85MM_NO_SILK]  37.2,53.55 0 top
JP437  [1X01_SMD_3.25X0.85MM_NO_SILK]  41.6,53.55 0 top
JP438  [1X01_SMD_3.25X0.85MM_NO_SILK]  46,53.55 0 top
JP439  [1X01_SMD_3.25X0.85MM_NO_SILK]  50.4,53.55 0 top
JP440  [1X01_SMD_3.25X0.85MM_NO_SILK]  54.8,53.55 0 top
JP441  [1X01_SMD_3.25X0.85MM_NO_SILK]  15.2,51.19 0 top
JP442  [1X01_SMD_3.25X0.85MM_NO_SILK]  19.6,51.19 0 top
JP443  [1X01_SMD_3.25X0.85MM_NO_SILK]  24,51.19 0 top
JP444  [1X01_SMD_3.25X0.85MM_NO_SILK]  28.4,51.19 0 top
JP445  [1X01_SMD_3.25X0.85MM_NO_SILK]  32.8,51.19 0 top
JP446  [1X01_SMD_3.25X0.85MM_NO_SILK]  37.2,51.19 0 top
JP447  [1X01_SMD_3.25X0.85MM_NO_SILK]  41.6,51.19 0 top
JP448  [1X01_SMD_3.25X0.85MM_NO_SILK]  46,51.19 0 top
JP449  [1X01_SMD_3.25X0.85MM_NO_SILK]  50.4,51.19 0 top
JP450  [1X01_SMD_3.25X0.85MM_NO_SILK]  54.8,51.19 0 top
JP451  [1X01_SMD_3.25X0.85MM_NO_SILK]  15.2,48.81 0 top
JP452  [1X01_SMD_3.25X0.85MM_NO_SILK]  19.6,48.81 0 top
JP453  [1X01_SMD_3.25X0.85MM_NO_SILK]  24,48.81 0 top
JP454  [1X01_SMD_3.25X0.85MM_NO_SILK]  28.4,48.81 0 top
JP455  [1X01_SMD_3.25X0.85MM_NO_SILK]  32.8,48.81 0 top
JP456  [1X01_SMD_3.25X0.85MM_NO_SILK]  37.2,48.81 0 top
JP457  [1X01_SMD_3.25X0.85MM_NO_SILK]  41.6,48.81 0 top
JP458  [1X01_SMD_3.25X0.85MM_NO_SILK]  46,48.81 0 top
JP459  [1X01_SMD_3.25X0.85MM_NO_SILK]  50.4,48.81 0 top
JP460  [1X01_SMD_3.25X0.85MM_NO_SILK]  54.8,48.81 0 top
JP461  [1X01_SMD_3.25X0.85MM_NO_SILK]  15.2,46.45 0 top
JP462  [1X01_SMD_3.25X0.85MM_NO_SILK]  19.6,46.45 0 top
JP463  [1X01_SMD_3.25X0.85MM_NO_SILK]  24,46.45 0 top
JP464  [1X01_SMD_3.25X0.85MM_NO_SILK]  28.4,46.45 0 top
JP465  [1X01_SMD_3.25X0.85MM_NO_SILK]  32.8,46.45 0 top
JP466  [1X01_SMD_3.25X0.85MM_NO_SILK]  37.2,46.45 0 top
JP467  [1X01_SMD_3.25X0.85MM_NO_SILK]  41.6,46.45 0 top
JP468  [1X01_SMD_3.25X0.85MM_NO_SILK]  46,46.45 0 top
JP469  [1X01_SMD_3.25X0.85MM_NO_SILK]  50.4,46.45 0 top
JP470  [1X01_SMD_3.25X0.85MM_NO_SILK]  54.8,46.45 0 top
JP471  [1X01_SMD_3.25X0.85MM_NO_SILK]  15.2,44.08 0 top
JP472  [1X01_SMD_3.25X0.85MM_NO_SILK]  19.6,44.08 0 top
JP473  [1X01_SMD_3.25X0.85MM_NO_SILK]  24,44.08 0 top
JP474  [1X01_SMD_3.25X0.85MM_NO_SILK]  28.4,44.08 0 top
JP475  [1X01_SMD_3.25X0.85MM_NO_SILK]  32.8,44.08 0 top
JP476  [1X01_SMD_3.25X0.85MM_NO_SILK]  37.2,44.08 0 top
JP477  [1X01_SMD_3.25X0.85MM_NO_SILK]  41.6,44.08 0 top
JP478  [1X01_SMD_3.25X0.85MM_NO_SILK]  46,44.08 0 top
JP479  [1X01_SMD_3.25X0.85MM_NO_SILK]  50.4,44.08 0 top
JP480  [1X01_SMD_3.25X0.85MM_NO_SILK]  54.8,44.08 0 top
JP481  [1X01_SMD_3.25X0.85MM_NO_SILK]  15.2,41.7 0 top
JP482  [1X01_SMD_3.25X0.85MM_NO_SILK]  19.6,41.7 0 top
JP483  [1X01_SMD_3.25X0.85MM_NO_SILK]  24,41.7 0 top
JP484  [1X01_SMD_3.25X0.85MM_NO_SILK]  28.4,41.7 0 top
JP485  [1X01_SMD_3.25X0.85MM_NO_SILK]  32.8,41.7 0 top
JP486  [1X01_SMD_3.25X0.85MM_NO_SILK]  37.2,41.7 0 top
JP487  [1X01_SMD_3.25X0.85MM_NO_SILK]  41.6,41.7 0 top
JP488  [1X01_SMD_3.25X0.85MM_NO_SILK]  46,41.7 0 top
JP489  [1X01_SMD_3.25X0.85MM_NO_SILK]  50.4,41.7 0 top
JP490  [1X01_SMD_3.25X0.85MM_NO_SILK]  54.8,41.7 0 top
JP491  [1X01_SMD_3.25X0.85MM_NO_SILK]  15.2,39.34 0 top
JP492  [1X01_SMD_3.25X0.85MM_NO_SILK]  19.6,39.34 0 top
JP493  [1X01_SMD_3.25X0.85MM_NO_SILK]  24,39.34 0 top
JP494  [1X01_SMD_3.25X0.85MM_NO_SILK]  28.4,39.34 0 top
JP495  [1X01_SMD_3.25X0.85MM_NO_SILK]  32.8,39.34 0 top
JP496  [1X01_SMD_3.25X0.85MM_NO_SILK]  37.2,39.34 0 top
JP497  [1X01_SMD_3.25X0.85MM_NO_SILK]  41.6,39.34 0 top
JP498  [1X01_SMD_3.25X0.85MM_NO_SILK]  46,39.34 0 top
JP499  [1X01_SMD_3.25X0.85MM_NO_SILK]  50.4,39.34 0 top
JP500  [1X01_SMD_3.25X0.85MM_NO_SILK]  54.8,39.34 0 top
JP501  [1X01_SMD_3.25X0.85MM_NO_SILK]  15.2,36.97 0 top
JP502  [1X01_SMD_3.25X0.85MM_NO_SILK]  19.6,36.97 0 top
JP503  [1X01_SMD_3.25X0.85MM_NO_SILK]  24,36.97 0 top
JP504  [1X01_SMD_3.25X0.85MM_NO_SILK]  28.4,36.97 0 top
JP505  [1X01_SMD_3.25X0.85MM_NO_SILK]  32.8,36.97 0 top
JP506  [1X01_SMD_3.25X0.85MM_NO_SILK]  37.2,36.97 0 top
JP507  [1X01_SMD_3.25X0.85MM_NO_SILK]  41.6,36.97 0 top
JP508  [1X01_SMD_3.25X0.85MM_NO_SILK]  46,36.97 0 top
JP509  [1X01_SMD_3.25X0.85MM_NO_SILK]  50.4,36.97 0 top
JP510  [1X01_SMD_3.25X0.85MM_NO_SILK]  54.8,36.97 0 top
JP511  [1X01_SMD_3.25X0.85MM_NO_SILK]  15.2,34.59 0 top
JP512  [1X01_SMD_3.25X0.85MM_NO_SILK]  19.6,34.59 0 top
JP513  [1X01_SMD_3.25X0.85MM_NO_SILK]  24,34.59 0 top
JP514  [1X01_SMD_3.25X0.85MM_NO_SILK]  28.4,34.59 0 top
JP515  [1X01_SMD_3.25X0.85MM_NO_SILK]  32.8,34.59 0 top
JP516  [1X01_SMD_3.25X0.85MM_NO_SILK]  37.2,34.59 0 top
JP517  [1X01_SMD_3.25X0.85MM_NO_SILK]  41.6,34.59 0 top
JP518  [1X01_SMD_3.25X0.85MM_NO_SILK]  46,34.59 0 top
JP519  [1X01_SMD_3.25X0.85MM_NO_SILK]  50.4,34.59 0 top
JP520  [1X01_SMD_3.25X0.85MM_NO_SILK]  54.8,34.59 0 top
JP521  [1X01_SMD_3.25X0.85MM_NO_SILK]  15.2,32.23 0 top
JP522  [1X01_SMD_3.25X0.85MM_NO_SILK]  19.6,32.23 0 top
JP523  [1X01_SMD_3.25X0.85MM_NO_SILK]  24,32.23 0 top
JP524  [1X01_SMD_3.25X0.85MM_NO_SILK]  28.4,32.23 0 top
JP525  [1X01_SMD_3.25X0.85MM_NO_SILK]  32.8,32.23 0 top
JP526  [1X01_SMD_3.25X0.85MM_NO_SILK]  37.2,32.23 0 top
JP527  [1X01_SMD_3.25X0.85MM_NO_SILK]  41.6,32.23 0 top
JP528  [1X01_SMD_3.25X0.85MM_NO_SILK]  46,32.23 0 top
JP529  [1X01_SMD_3.25X0.85MM_NO_SILK]  50.4,32.23 0 top
JP530  [1X01_SMD_3.25X0.85MM_NO_SILK]  54.8,32.23 0 top
JP531  [1X01_SMD_3.25X0.85MM_NO_SILK]  15.2,29.86 0 top
JP532  [1X01_SMD_3.25X0.85MM_NO_SILK]  19.6,29.86 0 top
JP533  [1X01_SMD_3.25X0.85MM_NO_SILK]  24,29.86 0 top
JP534  [1X01_SMD_3.25X0.85MM_NO_SILK]  28.4,29.86 0 top
JP535  [1X01_SMD_3.25X0.85MM_NO_SILK]  32.8,29.86 0 top
JP536  [1X01_SMD_3.25X0.85MM_NO_SILK]  37.2,29.86 0 top
JP537  [1X01_SMD_3.25X0.85MM_NO_SILK]  41.6,29.86 0 top
JP538  [1X01_SMD_3.25X0.85MM_NO_SILK]  46,29.86 0 top
JP539  [1X01_SMD_3.25X0.85MM_NO_SILK]  50.4,29.86 0 top
JP540  [1X01_SMD_3.25X0.85MM_NO_SILK]  54.8,29.86 0 top
JP541  [1X01_SMD_3.25X0.85MM_NO_SILK]  15.2,27.48 0 top
JP542  [1X01_SMD_3.25X0.85MM_NO_SILK]  19.6,27.48 0 top
JP543  [1X01_SMD_3.25X0.85MM_NO_SILK]  24,27.48 0 top
JP544  [1X01_SMD_3.25X0.85MM_NO_SILK]  28.4,27.48 0 top
JP545  [1X01_SMD_3.25X0.85MM_NO_SILK]  32.8,27.48 0 top
JP546  [1X01_SMD_3.25X0.85MM_NO_SILK]  37.2,27.48 0 top
JP547  [1X01_SMD_3.25X0.85MM_NO_SILK]  41.6,27.48 0 top
JP548  [1X01_SMD_3.25X0.85MM_NO_SILK]  46,27.48 0 top
JP549  [1X01_SMD_3.25X0.85MM_NO_SILK]  50.4,27.48 0 top
JP550  [1X01_SMD_3.25X0.85MM_NO_SILK]  54.8,27.48 0 top
JP551  [1X01_SMD_3.25X0.85MM_NO_SILK]  15.2,25.11 0 top
JP552  [1X01_SMD_3.25X0.85MM_NO_SILK]  19.6,25.11 0 top
JP553  [1X01_SMD_3.25X0.85MM_NO_SILK]  24,25.11 0 top
JP554  [1X01_SMD_3.25X0.85MM_NO_SILK]  28.4,25.11 0 top
JP555  [1X01_SMD_3.25X0.85MM_NO_SILK]  32.8,25.11 0 top
JP556  [1X01_SMD_3.25X0.85MM_NO_SILK]  37.2,25.11 0 top
JP557  [1X01_SMD_3.25X0.85MM_NO_SILK]  41.6,25.11 0 top
JP558  [1X01_SMD_3.25X0.85MM_NO_SILK]  46,25.11 0 top
JP559  [1X01_SMD_3.25X0.85MM_NO_SILK]  50.4,25.11 0 top
JP560  [1X01_SMD_3.25X0.85MM_NO_SILK]  54.8,25.11 0 top
JP561  [1X01_SMD_3.25X0.85MM_NO_SILK]  15.2,22.75 0 top
JP562  [1X01_SMD_3.25X0.85MM_NO_SILK]  19.6,22.75 0 top
JP563  [1X01_SMD_3.25X0.85MM_NO_SILK]  24,22.75 0 top
JP564  [1X01_SMD_3.25X0.85MM_NO_SILK]  28.4,22.75 0 top
JP565  [1X01_SMD_3.25X0.85MM_NO_SILK]  32.8,22.75 0 top
JP566  [1X01_SMD_3.25X0.85MM_NO_SILK]  37.2,22.75 0 top
JP567  [1X01_SMD_3.25X0.85MM_NO_SILK]  41.6,22.75 0 top
JP568  [1X01_SMD_3.25X0.85MM_NO_SILK]  46,22.75 0 top
JP569  [1X01_SMD_3.25X0.85MM_NO_SILK]  50.4,22.75 0 top
JP570  [1X01_SMD_3.25X0.85MM_NO_SILK]  54.8,22.75 0 top
JP571  [1X01_SMD_3.25X0.85MM_NO_SILK]  15.2,20.38 0 top
JP572  [1X01_SMD_3.25X0.85MM_NO_SILK]  19.6,20.38 0 top
JP573  [1X01_SMD_3.25X0.85MM_NO_SILK]  24,20.38 0 top
JP574  [1X01_SMD_3.25X0.85MM_NO_SILK]  28.4,20.38 0 top
JP575  [1X01_SMD_3.25X0.85MM_NO_SILK]  32.8,20.38 0 top
JP576  [1X01_SMD_3.25X0.85MM_NO_SILK]  37.2,20.38 0 top
JP577  [1X01_SMD_3.25X0.85MM_NO_SILK]  41.6,20.38 0 top
JP578  [1X01_SMD_3.25X0.85MM_NO_SILK]  46,20.38 0 top
JP579  [1X01_SMD_3.25X0.85MM_NO_SILK]  50.4,20.38 0 top
JP580  [1X01_SMD_3.25X0.85MM_NO_SILK]  54.8,20.38 0 top
JP581  [1X01_SMD_3.25X0.85MM_NO_SILK]  15.2,18 0 top
JP582  [1X01_SMD_3.25X0.85MM_NO_SILK]  19.6,18 0 top
JP583  [1X01_SMD_3.25X0.85MM_NO_SILK]  24,18 0 top
JP584  [1X01_SMD_3.25X0.85MM_NO_SILK]  28.4,18 0 top
JP585  [1X01_SMD_3.25X0.85MM_NO_SILK]  32.8,18 0 top
JP586  [1X01_SMD_3.25X0.85MM_NO_SILK]  37.2,18 0 top
JP587  [1X01_SMD_3.25X0.85MM_NO_SILK]  41.6,18 0 top
JP588  [1X01_SMD_3.25X0.85MM_NO_SILK]  46,18 0 top
JP589  [1X01_SMD_3.25X0.85MM_NO_SILK]  50.4,18 0 top
JP590  [1X01_SMD_3.25X0.85MM_NO_SILK]  54.8,18 0 top
JP591  [1X01_SMD_3.25X0.85MM_NO_SILK]  15.2,15.63 0 top
JP592  [1X01_SMD_3.25X0.85MM_NO_SILK]  19.6,15.63 0 top
JP593  [1X01_SMD_3.25X0.85MM_NO_SILK]  24,15.63 0 top
JP594  [1X01_SMD_3.25X0.85MM_NO_SILK]  28.4,15.63 0 top
JP595  [1X01_SMD_3.25X0.85MM_NO_SILK]  32.8,15.63 0 top
JP596  [1X01_SMD_3.25X0.85MM_NO_SILK]  37.2,15.63 0 top
JP597  [1X01_SMD_3.25X0.85MM_NO_SILK]  41.6,15.63 0 top
JP598  [1X01_SMD_3.25X0.85MM_NO_SILK]  46,15.63 0 top
JP599  [1X01_SMD_3.25X0.85MM_NO_SILK]  50.4,15.63 0 top
JP600  [1X01_SMD_3.25X0.85MM_NO_SILK]  54.8,15.63 0 top
JP601  [1X01_SMD_3.25X0.85MM_NO_SILK]  4,87.47 0 top
JP602  [1X01_SMD_3.25X0.85MM_NO_SILK]  4,86.19 0 top
JP603  [1X01_SMD_3.25X0.85MM_NO_SILK]  4,84.92 0 top
JP604  [1X01_SMD_3.25X0.85MM_NO_SILK]  4,83.66 0 top
JP605  [1X01_SMD_3.25X0.85MM_NO_SILK]  4,82.39 0 top
JP606  [1X01_SMD_3.25X0.85MM_NO_SILK]  4,81.11 0 top
JP607  [1X01_SMD_3.25X0.85MM_NO_SILK]  4,79.84 0 top
JP608  [1X01_SMD_3.25X0.85MM_NO_SILK]  4,78.58 0 top
JP609  [1X01_SMD_3.25X0.85MM_NO_SILK]  4,77.31 0 top
JP610  [1X01_SMD_3.25X0.85MM_NO_SILK]  4,76.03 0 top
JP611  [1X01_SMD_3.25X0.85MM_NO_SILK]  4,74.77 0 top
JP612  [1X01_SMD_3.25X0.85MM_NO_SILK]  4,73.5 0 top
JP613  [1X01_SMD_3.25X0.85MM_NO_SILK]  4,72.22 0 top
JP614  [1X01_SMD_3.25X0.85MM_NO_SILK]  4,70.95 0 top
JP615  [1X01_SMD_3.25X0.85MM_NO_SILK]  4,69.69 0 top
JP616  [1X01_SMD_3.25X0.85MM_NO_SILK]  4,68.42 0 top
JP617  [1X01_SMD_3.25X0.85MM_NO_SILK]  4,67.14 0 top
JP618  [1X01_SMD_3.25X0.85MM_NO_SILK]  4,65.88 0 top
JP619  [1X01_SMD_3.25X0.85MM_NO_SILK]  4,64.61 0 top
JP620  [1X01_SMD_3.25X0.85MM_NO_SILK]  4,63.34 0 top
JP621  [1X01_SMD_3.25X0.85MM_NO_SILK]  4,62.06 0 top
JP622  [1X01_SMD_3.25X0.85MM_NO_SILK]  4,60.8 0 top
JP623  [1X01_SMD_3.25X0.85MM_NO_SILK]  4,59.52 0 top
JP624  [1X01_SMD_3.25X0.85MM_NO_SILK]  4,58.26 0 top
JP625  [1X01_SMD_3.25X0.85MM_NO_SILK]  4,56.98 0 top
JP626  [1X01_SMD_3.25X0.85MM_NO_SILK]  4,55.72 0 top
JP627  [1X01_SMD_3.25X0.85MM_NO_SILK]  4,54.45 0 top
JP628  [1X01_SMD_3.25X0.85MM_NO_SILK]  4,53.17 0 top
JP629  [1X01_SMD_3.25X0.85MM_NO_SILK]  4,51.91 0 top
JP630  [1X01_SMD_3.25X0.85MM_NO_SILK]  4,50.63 0 top
JP631  [1X01_SMD_3.25X0.85MM_NO_SILK]  4,49.37 0 top
JP632  [1X01_SMD_3.25X0.85MM_NO_SILK]  4,48.09 0 top
JP633  [1X01_SMD_3.25X0.85MM_NO_SILK]  4,46.83 0 top
JP634  [1X01_SMD_3.25X0.85MM_NO_SILK]  4,45.55 0 top
JP635  [1X01_SMD_3.25X0.85MM_NO_SILK]  4,44.28 0 top
JP636  [1X01_SMD_3.25X0.85MM_NO_SILK]  4,43.02 0 top
JP637  [1X01_SMD_3.25X0.85MM_NO_SILK]  4,41.74 0 top
JP638  [1X01_SMD_3.25X0.85MM_NO_SILK]  4,40.48 0 top
JP639  [1X01_SMD_3.25X0.85MM_NO_SILK]  4,39.2 0 top
JP640  [1X01_SMD_3.25X0.85MM_NO_SILK]  4,37.94 0 top
JP641  [1X01_SMD_3.25X0.85MM_NO_SILK]  4,36.66 0 top
JP642  [1X01_SMD_3.25X0.85MM_NO_SILK]  4,35.4 0 top
JP643  [1X01_SMD_3.25X0.85MM_NO_SILK]  4,34.12 0 top
JP644  [1X01_SMD_3.25X0.85MM_NO_SILK]  4,32.85 0 top
JP645  [1X01_SMD_3.25X0.85MM_NO_SILK]  4,31.59 0 top
JP646  [1X01_SMD_3.25X0.85MM_NO_SILK]  4,30.32 0 top
JP647  [1X01_SMD_3.25X0.85MM_NO_SILK]  4,29.05 0 top
JP648  [1X01_SMD_3.25X0.85MM_NO_SILK]  4,27.77 0 top
JP649  [1X01_SMD_3.25X0.85MM_NO_SILK]  4,26.5 0 top
JP650  [1X01_SMD_3.25X0.85MM_NO_SILK]  4,25.23 0 top
JP651  [1X01_SMD_3.25X0.85MM_NO_SILK]  4,23.96 0 top
JP652  [1X01_SMD_3.25X0.85MM_NO_SILK]  4,22.7 0 top
JP653  [1X01_SMD_3.25X0.85MM_NO_SILK]  4,21.43 0 top
JP654  [1X01_SMD_3.25X0.85MM_NO_SILK]  4,20.16 0 top
JP655  [1X01_SMD_3.25X0.85MM_NO_SILK]  4,18.89 0 top
JP656  [1X01_SMD_3.25X0.85MM_NO_SILK]  4,17.61 0 top
JP657  [1X01_SMD_3.25X0.85MM_NO_SILK]  4,16.34 0 top
JP658  [1X01_SMD_3.25X0.85MM_NO_SILK]  4,15.07 0 top
JP659  [1X01_SMD_3.25X0.85MM_NO_SILK]  4,13.8 0 top
JP660  [1X01_SMD_3.25X0.85MM_NO_SILK]  4,12.54 0 top
JP661  [1X01_SMD_3.25X0.85MM_NO_SILK]  9.27,87.47 0 top
JP662  [1X01_SMD_3.25X0.85MM_NO_SILK]  9.27,86.19 0 top
JP663  [1X01_SMD_3.25X0.85MM_NO_SILK]  9.27,84.92 0 top
JP664  [1X01_SMD_3.25X0.85MM_NO_SILK]  9.27,83.66 0 top
JP665  [1X01_SMD_3.25X0.85MM_NO_SILK]  9.27,82.39 0 top
JP666  [1X01_SMD_3.25X0.85MM_NO_SILK]  9.27,81.11 0 top
JP667  [1X01_SMD_3.25X0.85MM_NO_SILK]  9.27,79.84 0 top
JP668  [1X01_SMD_3.25X0.85MM_NO_SILK]  9.27,78.58 0 top
JP669  [1X01_SMD_3.25X0.85MM_NO_SILK]  9.27,77.31 0 top
JP670  [1X01_SMD_3.25X0.85MM_NO_SILK]  9.27,76.03 0 top
JP671  [1X01_SMD_3.25X0.85MM_NO_SILK]  9.27,74.77 0 top
JP672  [1X01_SMD_3.25X0.85MM_NO_SILK]  9.27,73.5 0 top
JP673  [1X01_SMD_3.25X0.85MM_NO_SILK]  9.27,72.22 0 top
JP674  [1X01_SMD_3.25X0.85MM_NO_SILK]  9.27,70.95 0 top
JP675  [1X01_SMD_3.25X0.85MM_NO_SILK]  9.27,69.69 0 top
JP676  [1X01_SMD_3.25X0.85MM_NO_SILK]  9.27,68.42 0 top
JP677  [1X01_SMD_3.25X0.85MM_NO_SILK]  9.27,67.14 0 top
JP678  [1X01_SMD_3.25X0.85MM_NO_SILK]  9.27,65.88 0 top
JP679  [1X01_SMD_3.25X0.85MM_NO_SILK]  9.27,64.61 0 top
JP680  [1X01_SMD_3.25X0.85MM_NO_SILK]  9.27,63.34 0 top
JP681  [1X01_SMD_3.25X0.85MM_NO_SILK]  9.27,62.06 0 top
JP682  [1X01_SMD_3.25X0.85MM_NO_SILK]  9.27,60.8 0 top
JP683  [1X01_SMD_3.25X0.85MM_NO_SILK]  9.27,59.52 0 top
JP684  [1X01_SMD_3.25X0.85MM_NO_SILK]  9.27,58.26 0 top
JP685  [1X01_SMD_3.25X0.85MM_NO_SILK]  9.27,56.98 0 top
JP686  [1X01_SMD_3.25X0.85MM_NO_SILK]  9.27,55.72 0 top
JP687  [1X01_SMD_3.25X0.85MM_NO_SILK]  9.27,54.45 0 top
JP688  [1X01_SMD_3.25X0.85MM_NO_SILK]  9.27,53.17 0 top
JP689  [1X01_SMD_3.25X0.85MM_NO_SILK]  9.27,51.91 0 top
JP690  [1X01_SMD_3.25X0.85MM_NO_SILK]  9.27,50.63 0 top
JP691  [1X01_SMD_3.25X0.85MM_NO_SILK]  9.27,49.37 0 top
JP692  [1X01_SMD_3.25X0.85MM_NO_SILK]  9.27,48.09 0 top
JP693  [1X01_SMD_3.25X0.85MM_NO_SILK]  9.27,46.83 0 top
JP694  [1X01_SMD_3.25X0.85MM_NO_SILK]  9.27,45.55 0 top
JP695  [1X01_SMD_3.25X0.85MM_NO_SILK]  9.27,44.28 0 top
JP696  [1X01_SMD_3.25X0.85MM_NO_SILK]  9.27,43.02 0 top
JP697  [1X01_SMD_3.25X0.85MM_NO_SILK]  9.27,41.74 0 top
JP698  [1X01_SMD_3.25X0.85MM_NO_SILK]  9.27,40.48 0 top
JP699  [1X01_SMD_3.25X0.85MM_NO_SILK]  9.27,39.2 0 top
JP700  [1X01_SMD_3.25X0.85MM_NO_SILK]  9.27,37.94 0 top
JP701  [1X01_SMD_3.25X0.85MM_NO_SILK]  9.27,36.66 0 top
JP702  [1X01_SMD_3.25X0.85MM_NO_SILK]  9.27,35.4 0 top
JP703  [1X01_SMD_3.25X0.85MM_NO_SILK]  9.27,34.12 0 top
JP704  [1X01_SMD_3.25X0.85MM_NO_SILK]  9.27,32.85 0 top
JP705  [1X01_SMD_3.25X0.85MM_NO_SILK]  9.27,31.59 0 top
JP706  [1X01_SMD_3.25X0.85MM_NO_SILK]  9.27,30.32 0 top
JP707  [1X01_SMD_3.25X0.85MM_NO_SILK]  9.27,29.05 0 top
JP708  [1X01_SMD_3.25X0.85MM_NO_SILK]  9.27,27.77 0 top
JP709  [1X01_SMD_3.25X0.85MM_NO_SILK]  9.27,26.5 0 top
JP710  [1X01_SMD_3.25X0.85MM_NO_SILK]  9.27,25.23 0 top
JP711  [1X01_SMD_3.25X0.85MM_NO_SILK]  9.27,23.96 0 top
JP712  [1X01_SMD_3.25X0.85MM_NO_SILK]  9.27,22.7 0 top
JP713  [1X01_SMD_3.25X0.85MM_NO_SILK]  9.27,21.43 0 top
JP714  [1X01_SMD_3.25X0.85MM_NO_SILK]  9.27,20.16 0 top
JP715  [1X01_SMD_3.25X0.85MM_NO_SILK]  9.27,18.89 0 top
JP716  [1X01_SMD_3.25X0.85MM_NO_SILK]  9.27,17.61 0 top
JP717  [1X01_SMD_3.25X0.85MM_NO_SILK]  9.27,16.34 0 top
JP718  [1X01_SMD_3.25X0.85MM_NO_SILK]  9.27,15.07 0 top
JP719  [1X01_SMD_3.25X0.85MM_NO_SILK]  9.27,13.8 0 top
JP720  [1X01_SMD_3.25X0.85MM_NO_SILK]  9.27,12.54 0 top
JP721  [1X01_SMD_3.25X0.85MM_NO_SILK]  60.73,87.47 0 top
JP722  [1X01_SMD_3.25X0.85MM_NO_SILK]  60.73,86.19 0 top
JP723  [1X01_SMD_3.25X0.85MM_NO_SILK]  60.73,84.92 0 top
JP724  [1X01_SMD_3.25X0.85MM_NO_SILK]  60.73,83.66 0 top
JP725  [1X01_SMD_3.25X0.85MM_NO_SILK]  60.73,82.39 0 top
JP726  [1X01_SMD_3.25X0.85MM_NO_SILK]  60.73,81.11 0 top
JP727  [1X01_SMD_3.25X0.85MM_NO_SILK]  60.73,79.84 0 top
JP728  [1X01_SMD_3.25X0.85MM_NO_SILK]  60.73,78.58 0 top
JP729  [1X01_SMD_3.25X0.85MM_NO_SILK]  60.73,77.31 0 top
JP730  [1X01_SMD_3.25X0.85MM_NO_SILK]  60.73,76.03 0 top
JP731  [1X01_SMD_3.25X0.85MM_NO_SILK]  60.73,74.77 0 top
JP732  [1X01_SMD_3.25X0.85MM_NO_SILK]  60.73,73.5 0 top
JP733  [1X01_SMD_3.25X0.85MM_NO_SILK]  60.73,72.22 0 top
JP734  [1X01_SMD_3.25X0.85MM_NO_SILK]  60.73,70.95 0 top
JP735  [1X01_SMD_3.25X0.85MM_NO_SILK]  60.73,69.69 0 top
JP736  [1X01_SMD_3.25X0.85MM_NO_SILK]  60.73,68.42 0 top
JP737  [1X01_SMD_3.25X0.85MM_NO_SILK]  60.73,67.14 0 top
JP738  [1X01_SMD_3.25X0.85MM_NO_SILK]  60.73,65.88 0 top
JP739  [1X01_SMD_3.25X0.85MM_NO_SILK]  60.73,64.61 0 top
JP740  [1X01_SMD_3.25X0.85MM_NO_SILK]  60.73,63.34 0 top
JP741  [1X01_SMD_3.25X0.85MM_NO_SILK]  60.73,62.06 0 top
JP742  [1X01_SMD_3.25X0.85MM_NO_SILK]  60.73,60.8 0 top
JP743  [1X01_SMD_3.25X0.85MM_NO_SILK]  60.73,59.52 0 top
JP744  [1X01_SMD_3.25X0.85MM_NO_SILK]  60.73,58.26 0 top
JP745  [1X01_SMD_3.25X0.85MM_NO_SILK]  60.73,56.98 0 top
JP746  [1X01_SMD_3.25X0.85MM_NO_SILK]  60.73,55.72 0 top
JP747  [1X01_SMD_3.25X0.85MM_NO_SILK]  60.73,54.45 0 top
JP748  [1X01_SMD_3.25X0.85MM_NO_SILK]  60.73,53.17 0 top
JP749  [1X01_SMD_3.25X0.85MM_NO_SILK]  60.73,51.91 0 top
JP750  [1X01_SMD_3.25X0.85MM_NO_SILK]  60.73,50.63 0 top
JP751  [1X01_SMD_3.25X0.85MM_NO_SILK]  60.73,49.37 0 top
JP752  [1X01_SMD_3.25X0.85MM_NO_SILK]  60.73,48.09 0 top
JP753  [1X01_SMD_3.25X0.85MM_NO_SILK]  60.73,46.83 0 top
JP754  [1X01_SMD_3.25X0.85MM_NO_SILK]  60.73,45.55 0 top
JP755  [1X01_SMD_3.25X0.85MM_NO_SILK]  60.73,44.28 0 top
JP756  [1X01_SMD_3.25X0.85MM_NO_SILK]  60.73,43.02 0 top
JP757  [1X01_SMD_3.25X0.85MM_NO_SILK]  60.73,41.74 0 top
JP758  [1X01_SMD_3.25X0.85MM_NO_SILK]  60.73,40.48 0 top
JP759  [1X01_SMD_3.25X0.85MM_NO_SILK]  60.73,39.2 0 top
JP760  [1X01_SMD_3.25X0.85MM_NO_SILK]  60.73,37.94 0 top
JP761  [1X01_SMD_3.25X0.85MM_NO_SILK]  60.73,36.66 0 top
JP762  [1X01_SMD_3.25X0.85MM_NO_SILK]  60.73,35.4 0 top
JP763  [1X01_SMD_3.25X0.85MM_NO_SILK]  60.73,34.12 0 top
JP764  [1X01_SMD_3.25X0.85MM_NO_SILK]  60.73,32.85 0 top
JP765  [1X01_SMD_3.25X0.85MM_NO_SILK]  60.73,31.59 0 top
JP766  [1X01_SMD_3.25X0.85MM_NO_SILK]  60.73,30.32 0 top
JP767  [1X01_SMD_3.25X0.85MM_NO_SILK]  60.73,29.05 0 top
JP768  [1X01_SMD_3.25X0.85MM_NO_SILK]  60.73,27.77 0 top
JP769  [1X01_SMD_3.25X0.85MM_NO_SILK]  60.73,26.5 0 top
JP770  [1X01_SMD_3.25X0.85MM_NO_SILK]  60.73,25.23 0 top
JP771  [1X01_SMD_3.25X0.85MM_NO_SILK]  60.73,23.96 0 top
JP772  [1X01_SMD_3.25X0.85MM_NO_SILK]  60.73,22.7 0 top
JP773  [1X01_SMD_3.25X0.85MM_NO_SILK]  60.73,21.43 0 top
JP774  [1X01_SMD_3.25X0.85MM_NO_SILK]  60.73,20.16 0 top
JP775  [1X01_SMD_3.25X0.85MM_NO_SILK]  60.73,18.89 0 top
JP776  [1X01_SMD_3.25X0.85MM_NO_SILK]  60.73,17.61 0 top
JP777  [1X01_SMD_3.25X0.85MM_NO_SILK]  60.73,16.34 0 top
JP778  [1X01_SMD_3.25X0.85MM_NO_SILK]  60.73,15.07 0 top
JP779  [1X01_SMD_3.25X0.85MM_NO_SILK]  60.73,13.8 0 top
JP780  [1X01_SMD_3.25X0.85MM_NO_SILK]  60.73,12.54 0 top
JP781  [1X01_SMD_3.25X0.85MM_NO_SILK]  66,87.47 0 top
JP782  [1X01_SMD_3.25X0.85MM_NO_SILK]  66,86.19 0 top
JP783  [1X01_SMD_3.25X0.85MM_NO_SILK]  66,84.92 0 top
JP784  [1X01_SMD_3.25X0.85MM_NO_SILK]  66,83.66 0 top
JP785  [1X01_SMD_3.25X0.85MM_NO_SILK]  66,82.39 0 top
JP786  [1X01_SMD_3.25X0.85MM_NO_SILK]  66,81.11 0 top
JP787  [1X01_SMD_3.25X0.85MM_NO_SILK]  66,79.84 0 top
JP788  [1X01_SMD_3.25X0.85MM_NO_SILK]  66,78.58 0 top
JP789  [1X01_SMD_3.25X0.85MM_NO_SILK]  66,77.31 0 top
JP790  [1X01_SMD_3.25X0.85MM_NO_SILK]  66,76.03 0 top
JP791  [1X01_SMD_3.25X0.85MM_NO_SILK]  66,74.77 0 top
JP792  [1X01_SMD_3.25X0.85MM_NO_SILK]  66,73.5 0 top
JP793  [1X01_SMD_3.25X0.85MM_NO_SILK]  66,72.22 0 top
JP794  [1X01_SMD_3.25X0.85MM_NO_SILK]  66,70.95 0 top
JP795  [1X01_SMD_3.25X0.85MM_NO_SILK]  66,69.69 0 top
JP796  [1X01_SMD_3.25X0.85MM_NO_SILK]  66,68.42 0 top
JP797  [1X01_SMD_3.25X0.85MM_NO_SILK]  66,67.14 0 top
JP798  [1X01_SMD_3.25X0.85MM_NO_SILK]  66,65.88 0 top
JP799  [1X01_SMD_3.25X0.85MM_NO_SILK]  66,64.61 0 top
JP800  [1X01_SMD_3.25X0.85MM_NO_SILK]  66,63.34 0 top
JP801  [1X01_SMD_3.25X0.85MM_NO_SILK]  66,62.06 0 top
JP802  [1X01_SMD_3.25X0.85MM_NO_SILK]  66,60.8 0 top
JP803  [1X01_SMD_3.25X0.85MM_NO_SILK]  66,59.52 0 top
JP804  [1X01_SMD_3.25X0.85MM_NO_SILK]  66,58.26 0 top
JP805  [1X01_SMD_3.25X0.85MM_NO_SILK]  66,56.98 0 top
JP806  [1X01_SMD_3.25X0.85MM_NO_SILK]  66,55.72 0 top
JP807  [1X01_SMD_3.25X0.85MM_NO_SILK]  66,54.45 0 top
JP808  [1X01_SMD_3.25X0.85MM_NO_SILK]  66,53.17 0 top
JP809  [1X01_SMD_3.25X0.85MM_NO_SILK]  66,51.91 0 top
JP810  [1X01_SMD_3.25X0.85MM_NO_SILK]  66,50.63 0 top
JP811  [1X01_SMD_3.25X0.85MM_NO_SILK]  66,49.37 0 top
JP812  [1X01_SMD_3.25X0.85MM_NO_SILK]  66,48.09 0 top
JP813  [1X01_SMD_3.25X0.85MM_NO_SILK]  66,46.83 0 top
JP814  [1X01_SMD_3.25X0.85MM_NO_SILK]  66,45.55 0 top
JP815  [1X01_SMD_3.25X0.85MM_NO_SILK]  66,44.28 0 top
JP816  [1X01_SMD_3.25X0.85MM_NO_SILK]  66,43.02 0 top
JP817  [1X01_SMD_3.25X0.85MM_NO_SILK]  66,41.74 0 top
JP818  [1X01_SMD_3.25X0.85MM_NO_SILK]  66,40.48 0 top
JP819  [1X01_SMD_3.25X0.85MM_NO_SILK]  66,39.2 0 top
JP820  [1X01_SMD_3.25X0.85MM_NO_SILK]  66,37.94 0 top
JP821  [1X01_SMD_3.25X0.85MM_NO_SILK]  66,36.66 0 top
JP822  [1X01_SMD_3.25X0.85MM_NO_SILK]  66,35.4 0 top
JP823  [1X01_SMD_3.25X0.85MM_NO_SILK]  66,34.12 0 top
JP824  [1X01_SMD_3.25X0.85MM_NO_SILK]  66,32.85 0 top
JP825  [1X01_SMD_3.25X0.85MM_NO_SILK]  66,31.59 0 top
JP826  [1X01_SMD_3.25X0.85MM_NO_SILK]  66,30.32 0 top
JP827  [1X01_SMD_3.25X0.85MM_NO_SILK]  66,29.05 0 top
JP828  [1X01_SMD_3.25X0.85MM_NO_SILK]  66,27.77 0 top
JP829  [1X01_SMD_3.25X0.85MM_NO_SILK]  66,26.5 0 top
JP830  [1X01_SMD_3.25X0.85MM_NO_SILK]  66,25.23 0 top
JP831  [1X01_SMD_3.25X0.85MM_NO_SILK]  66,23.96 0 top
JP832  [1X01_SMD_3.25X0.85MM_NO_SILK]  66,22.7 0 top
JP833  [1X01_SMD_3.25X0.85MM_NO_SILK]  66,21.43 0 top
JP834  [1X01_SMD_3.25X0.85MM_NO_SILK]  66,20.16 0 top
JP835  [1X01_SMD_3.25X0.85MM_NO_SILK]  66,18.89 0 top
JP836  [1X01_SMD_3.25X0.85MM_NO_SILK]  66,17.61 0 top
JP837  [1X01_SMD_3.25X0.85MM_NO_SILK]  66,16.34 0 top
JP838  [1X01_SMD_3.25X0.85MM_NO_SILK]  66,15.07 0 top
JP839  [1X01_SMD_3.25X0.85MM_NO_SILK]  66,13.8 0 top
JP840  [1X01_SMD_3.25X0.85MM_NO_SILK]  66,12.54 0 top
JP841  [1X01_SMD_3.25X0.85MM_NO_SILK]  19.12,95.2 270 top
JP842  [1X01_SMD_3.25X0.85MM_NO_SILK]  20.39,95.2 270 top
JP843  [1X01_SMD_3.25X0.85MM_NO_SILK]  21.66,95.2 270 top
JP844  [1X01_SMD_3.25X0.85MM_NO_SILK]  22.93,95.2 270 top
JP845  [1X01_SMD_3.25X0.85MM_NO_SILK]  24.2,95.2 270 top
JP846  [1X01_SMD_3.25X0.85MM_NO_SILK]  25.48,95.2 270 top
JP847  [1X01_SMD_3.25X0.85MM_NO_SILK]  26.75,95.2 270 top
JP848  [1X01_SMD_3.25X0.85MM_NO_SILK]  28.02,95.2 270 top
JP849  [1X01_SMD_3.25X0.85MM_NO_SILK]  29.29,95.2 270 top
JP850  [1X01_SMD_3.25X0.85MM_NO_SILK]  30.55,95.2 270 top
JP851  [1X01_SMD_3.25X0.85MM_NO_SILK]  19.12,91.01 270 top
JP852  [1X01_SMD_3.25X0.85MM_NO_SILK]  20.39,91.01 270 top
JP853  [1X01_SMD_3.25X0.85MM_NO_SILK]  21.66,91.01 270 top
JP854  [1X01_SMD_3.25X0.85MM_NO_SILK]  22.93,91.01 270 top
JP855  [1X01_SMD_3.25X0.85MM_NO_SILK]  24.2,91.01 270 top
JP856  [1X01_SMD_3.25X0.85MM_NO_SILK]  25.48,91.01 270 top
JP857  [1X01_SMD_3.25X0.85MM_NO_SILK]  26.75,91.01 270 top
JP858  [1X01_SMD_3.25X0.85MM_NO_SILK]  28.02,91.01 270 top
JP859  [1X01_SMD_3.25X0.85MM_NO_SILK]  29.29,91.01 270 top
JP860  [1X01_SMD_3.25X0.85MM_NO_SILK]  30.55,91.01 270 top
JP861  [1X01_SMD_3.25X0.85MM_NO_SILK]  39.45,95.2 270 top
JP862  [1X01_SMD_3.25X0.85MM_NO_SILK]  40.72,95.2 270 top
JP863  [1X01_SMD_3.25X0.85MM_NO_SILK]  41.98,95.2 270 top
JP864  [1X01_SMD_3.25X0.85MM_NO_SILK]  43.26,95.2 270 top
JP865  [1X01_SMD_3.25X0.85MM_NO_SILK]  44.52,95.2 270 top
JP866  [1X01_SMD_3.25X0.85MM_NO_SILK]  45.8,95.2 270 top
JP867  [1X01_SMD_3.25X0.85MM_NO_SILK]  47.06,95.2 270 top
JP868  [1X01_SMD_3.25X0.85MM_NO_SILK]  48.34,95.2 270 top
JP869  [1X01_SMD_3.25X0.85MM_NO_SILK]  49.6,95.2 270 top
JP870  [1X01_SMD_3.25X0.85MM_NO_SILK]  50.88,95.2 270 top
JP871  [1X01_SMD_3.25X0.85MM_NO_SILK]  39.45,91.01 270 top
JP872  [1X01_SMD_3.25X0.85MM_NO_SILK]  40.72,91.01 270 top
JP873  [1X01_SMD_3.25X0.85MM_NO_SILK]  41.98,91.01 270 top
JP874  [1X01_SMD_3.25X0.85MM_NO_SILK]  43.26,91.01 270 top
JP875  [1X01_SMD_3.25X0.85MM_NO_SILK]  44.52,91.01 270 top
JP876  [1X01_SMD_3.25X0.85MM_NO_SILK]  45.8,91.01 270 top
JP877  [1X01_SMD_3.25X0.85MM_NO_SILK]  47.06,91.01 270 top
JP878  [1X01_SMD_3.25X0.85MM_NO_SILK]  48.34,91.01 270 top
JP879  [1X01_SMD_3.25X0.85MM_NO_SILK]  49.6,91.01 270 top
JP880  [1X01_SMD_3.25X0.85MM_NO_SILK]  50.88,91.01 270 top
JP881  [1X01_SMD_3.25X0.85MM_NO_SILK]  19.12,5.9 270 top
JP882  [1X01_SMD_3.25X0.85MM_NO_SILK]  20.39,5.9 270 top
JP883  [1X01_SMD_3.25X0.85MM_NO_SILK]  21.66,5.9 270 top
JP884  [1X01_SMD_3.25X0.85MM_NO_SILK]  22.93,5.9 270 top
JP885  [1X01_SMD_3.25X0.85MM_NO_SILK]  24.2,5.9 270 top
JP886  [1X01_SMD_3.25X0.85MM_NO_SILK]  25.48,5.9 270 top
JP887  [1X01_SMD_3.25X0.85MM_NO_SILK]  26.75,5.9 270 top
JP888  [1X01_SMD_3.25X0.85MM_NO_SILK]  28.02,5.9 270 top
JP889  [1X01_SMD_3.25X0.85MM_NO_SILK]  29.29,5.9 270 top
JP890  [1X01_SMD_3.25X0.85MM_NO_SILK]  30.55,5.9 270 top
JP891  [1X01_SMD_3.25X0.85MM_NO_SILK]  39.45,5.9 270 top
JP892  [1X01_SMD_3.25X0.85MM_NO_SILK]  40.72,5.9 270 top
JP893  [1X01_SMD_3.25X0.85MM_NO_SILK]  41.98,5.9 270 top
JP894  [1X01_SMD_3.25X0.85MM_NO_SILK]  43.26,5.9 270 top
JP895  [1X01_SMD_3.25X0.85MM_NO_SILK]  44.52,5.9 270 top
JP896  [1X01_SMD_3.25X0.85MM_NO_SILK]  45.8,5.9 270 top
JP897  [1X01_SMD_3.25X0.85MM_NO_SILK]  47.06,5.9 270 top
JP898  [1X01_SMD_3.25X0.85MM_NO_SILK]  48.34,5.9 270 top
JP899  [1X01_SMD_3.25X0.85MM_NO_SILK]  49.6,5.9 270 top
JP900  [1X01_SMD_3.25X0.85MM_NO_SILK]  50.88,5.9 270 top
JP901  [1X01_SMD_3.25X0.85MM_NO_SILK]  4,87.47 0 top
JP902  [1X01_SMD_3.25X0.85MM_NO_SILK]  4,86.19 0 top
JP903  [1X01_SMD_3.25X0.85MM_NO_SILK]  4,84.92 0 top
JP904  [1X01_SMD_3.25X0.85MM_NO_SILK]  4,83.66 0 top
JP905  [1X01_SMD_3.25X0.85MM_NO_SILK]  4,82.39 0 top
JP906  [1X01_SMD_3.25X0.85MM_NO_SILK]  4,81.11 0 top
JP907  [1X01_SMD_3.25X0.85MM_NO_SILK]  4,79.84 0 top
JP908  [1X01_SMD_3.25X0.85MM_NO_SILK]  4,78.58 0 top
JP909  [1X01_SMD_3.25X0.85MM_NO_SILK]  4,77.31 0 top
JP910  [1X01_SMD_3.25X0.85MM_NO_SILK]  4,76.03 0 top
JP911  [1X01_SMD_3.25X0.85MM_NO_SILK]  4,74.77 0 top
JP912  [1X01_SMD_3.25X0.85MM_NO_SILK]  4,73.5 0 top
JP913  [1X01_SMD_3.25X0.85MM_NO_SILK]  4,72.22 0 top
JP914  [1X01_SMD_3.25X0.85MM_NO_SILK]  4,70.95 0 top
JP915  [1X01_SMD_3.25X0.85MM_NO_SILK]  4,69.69 0 top
JP916  [1X01_SMD_3.25X0.85MM_NO_SILK]  4,68.42 0 top
JP917  [1X01_SMD_3.25X0.85MM_NO_SILK]  4,67.14 0 top
JP918  [1X01_SMD_3.25X0.85MM_NO_SILK]  4,65.88 0 top
JP919  [1X01_SMD_3.25X0.85MM_NO_SILK]  4,64.61 0 top
JP920  [1X01_SMD_3.25X0.85MM_NO_SILK]  4,63.34 0 top
JP921  [1X01_SMD_3.25X0.85MM_NO_SILK]  4,62.06 0 top
JP922  [1X01_SMD_3.25X0.85MM_NO_SILK]  4,60.8 0 top
JP923  [1X01_SMD_3.25X0.85MM_NO_SILK]  4,59.52 0 top
JP924  [1X01_SMD_3.25X0.85MM_NO_SILK]  4,58.26 0 top
JP925  [1X01_SMD_3.25X0.85MM_NO_SILK]  4,56.98 0 top
JP926  [1X01_SMD_3.25X0.85MM_NO_SILK]  4,55.72 0 top
JP927  [1X01_SMD_3.25X0.85MM_NO_SILK]  4,54.45 0 top
JP928  [1X01_SMD_3.25X0.85MM_NO_SILK]  4,53.17 0 top
JP929  [1X01_SMD_3.25X0.85MM_NO_SILK]  4,51.91 0 top
JP930  [1X01_SMD_3.25X0.85MM_NO_SILK]  4,50.63 0 top
JP931  [1X01_SMD_3.25X0.85MM_NO_SILK]  4,49.37 0 top
JP932  [1X01_SMD_3.25X0.85MM_NO_SILK]  4,48.09 0 top
JP933  [1X01_SMD_3.25X0.85MM_NO_SILK]  4,46.83 0 top
JP934  [1X01_SMD_3.25X0.85MM_NO_SILK]  4,45.55 0 top
JP935  [1X01_SMD_3.25X0.85MM_NO_SILK]  4,44.28 0 top
JP936  [1X01_SMD_3.25X0.85MM_NO_SILK]  4,43.02 0 top
JP937  [1X01_SMD_3.25X0.85MM_NO_SILK]  4,41.74 0 top
JP938  [1X01_SMD_3.25X0.85MM_NO_SILK]  4,40.48 0 top